# Allegro board 8266-OLED-TIMER-MAX-V2-4L.brd
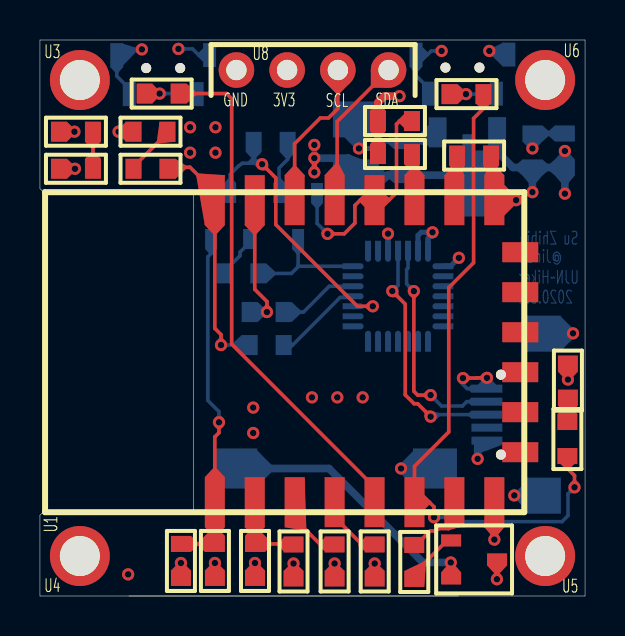
[diagram p0: board, top side]
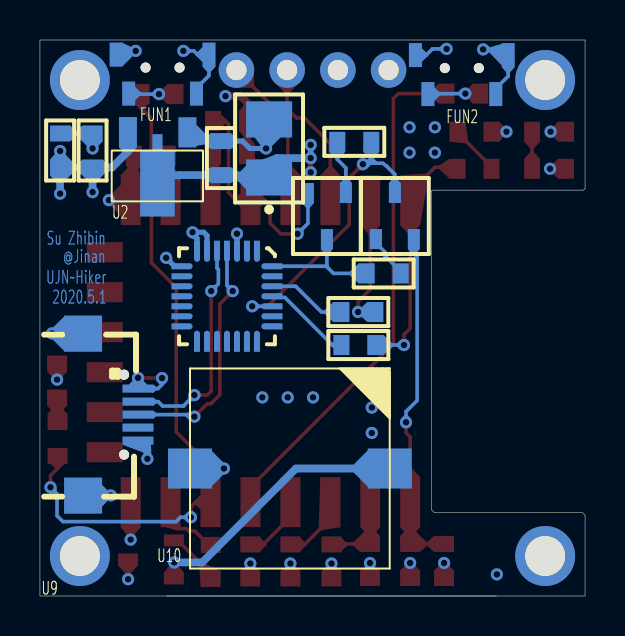
[diagram p1: board, bottom side, seen from below]

Outline 27.3 x 27.8 mm; copper layers: TOP, GND, VCC, BOTTOM. Coordinates in mm from the lower left corner of the outline.
Outline path: 4.45,0 20.95,0 ; 0,27.8 27.3,27.8 27.3,0 0,0 0,4.04 0.13,4.17 7.54,4.17 7.7,4.32 7.7,20.24 7.65,20.29 0.08,20.29 0,20.37 0,27.8

## Design rules (mm)
net group DIFFPAIR1: nets DN DP
net group DIFFPAIR3: nets SCL SDA
net group DIFFPAIR5: nets N136309 N136318

## Placement (name value [footprint] x y rotation side)
C1  0.1u  [SMD0603]  24.66 22.28 90 bottom
C2  0.1u  [SMD0603]  18.24 21.89 90 bottom
C3  100nF  [SMD0603]  7.06 1.75 270 top
C5  10uF  [SMD0603]  26.29 22.28 90 bottom
C6  10uF  [SMDC3528]  15.82 22.38 90 bottom
D1  LED  [SMD0603]  1.8 21.36 0 top
D2  LED  [SMD0603]  5.54 21.36 180 top
D3  LED  [SMD0603]  26.42 7.85 90 top
FUN1  KEY  [2_4_3P5_KEY]  21.16 25.12 180 bottom
FUN2  KEY  [2_4_3P5_KEY]  6.17 25.1 180 bottom
Q1  S8050  [SOT23-3]  9.53 19 90 bottom
Q2  S8050  [SOT23-3]  12.93 19 270 bottom
Q3  S8050  [SOT23-3]  21.74 1.83 0 top
R1  10K  [SMD0603]  17.78 23.75 0 top
R2  10K  [SMD0603]  17.78 22.1 0 top
R3  470  [SMD0603]  16.76 1.73 90 top
R4  10K  [SMD0603]  8.76 1.75 90 top
R5  10K  [SMD0603]  14.76 1.73 90 top
R6  12K  [SMD0603]  10.77 1.75 90 top
R7  12K  [SMD0603]  21.74 22.02 0 top
R8  12K  [SMD0603]  12.7 1.73 270 top
R9  470  [SMD0603]  21.36 25.1 0 top
R10  1K  [SMD0603]  1.8 23.22 180 top
R11  470  [SMD0603]  5.54 23.22 180 top
R12  12K  [SMD0603]  10.08 16.13 0 bottom
R13  470  [SMD0603]  11.35 12.55 180 bottom
R14  470  [SMD0603]  6.1 25.12 0 top
R15  1K  [SMD0603]  18.75 1.7 270 top
R16  12K  [SMD0603]  11.56 22.71 180 bottom
R17  470  [SMD0603]  11.35 14.2 180 bottom
R18  1K  [SMD0603]  26.44 10.77 90 top
U1  ESP8266  [8266]  24.26 4.19 90 top
U2  LM1117F-3.3  [SOT89]  19.91 22.68 270 bottom
U3  1PIN  [HOLE_2MM]  2 25.8 0 top
U4  1PIN  [HOLE_2MM]  2 2 0 top
U5  1PIN  [HOLE_2MM]  25.3 2 0 top
U6  1PIN  [HOLE_2MM]  25.3 25.8 0 top
U7  CP2102  [QFN28]  17.93 14.99 270 bottom
U8  4PIN  [SIP4]  9.84 26.3 0 top
U9  7PIN  [MICROUSB]  24.59 9.07 270 bottom
U10  2PIN  [9650B]  14.78 6.38 0 bottom

## Library data of the parts
C1-C3 C5 = CAP NP
C6 = CAP
D1-D3 = LED
FUN1 FUN2 = KEY_1
Q1-Q3 = NPN BCE
R1-R18 = R
U1 = 8266_0
U2 = lm1117f-3_0.3
U3-U6 = 1PIN
U7 = CP2102_2
U8 = 4PIN
U9 = 7PIN
U10 = 2PIN

## Footprints (pads in the part's own frame, mm; a bottom-side part is the same pattern mirrored in y, then rotated)
2_4_3P5_KEY
  round 0.5 hole 0.749 unplated: (-0.851,1.3) (0.851,1.3)
  rect 0.65x1.199 smd: 1(-1.699,0) 2(1.699,0) 3(-2.324,1.951) 4(2.324,1.951)
8266
  rect 2.499x1.001 smd: 1(0.5,15.499) 2(0.5,13.5) 3(0.5,11.501) 4(0.5,9.5) 5(0.5,7.501) 6(0.5,5.499) 7(0.5,3.5) 8(0.5,1.501) 15(15.601,1.501) 16(15.601,3.5) 17(15.601,5.499) 18(15.601,7.501) 19(15.601,9.5) 20(15.601,11.501) 21(15.601,13.5) 22(15.601,15.499)
  rect 1.001x1.801 smd: 9(3,0.201) 10(5.001,0.201) 11(7,0.201) 12(8.999,0.201) 13(11.001,0.201) 14(13,0.201)
9650B
  rect 2.2x1.999 smd: 1(-5.001,0) 2(5.001,0)
HOLE_2MM
  round 3 hole 1.999 unplated: (0,0)
MICROUSB
  round 0.5 hole 0.5 unplated: (-1.999,1.501) (1.999,1.501)
  rect 0.399x1.549 smd: 1(-1.3,2.2) 2(-0.65,2.2) 3(0,2.2) 4(0.65,2.2) 5(1.3,2.2)
  rect 1.801x1.9 smd: 6(-4.049,-0.551) 7(4.049,-0.551)
QFN28
  custom 1.052x0.3 smd: 1(-2.25,1.501) 2(-2.25,1.001) 3(-2.25,0.5) 4(-2.25,0) 5(-2.25,-0.5) 6(-2.25,-1.001) 7(-2.25,-1.501) 15(2.25,-1.501) 16(2.25,-1.001) 17(2.25,-0.5) 18(2.25,0) 19(2.25,0.5) 20(2.25,1.001) 21(2.25,1.501)
  custom 0.3x1.052 smd: 8(-1.501,-2.25) 9(-1.001,-2.25) 10(-0.5,-2.25) 11(0,-2.25) 12(0.5,-2.25) 13(1.001,-2.25) 14(1.501,-2.25) 22(1.501,2.25) 23(1.001,2.25) 24(0.5,2.25) 25(0,2.25) 26(-0.5,2.25) 27(-1.001,2.25) 28(-1.501,2.25)
SIP4
  round 1.778 hole 1.016: 1(0,0) 2(2.54,0) 3(5.08,0) 4(7.62,0)
SMD0603
  rect 0.8x1.001 smd: 1(-0.851,0) 2(0.851,0)
SMDC3528
  rect 1.801x2.301 smd: 1(-1.45,0) 2(1.45,0)
SOT23-3
  rect 1.001x0.599 smd: 1(-1.151,0.95) 2(-1.151,-0.95) 3(1.151,0)
SOT89
  rect 1.501x0.899 smd: 1(-0.5,0) 3(-0.511,-2.979)
  custom 4.115x1.727 smd: 2(1.651,-1.501)

## Nets
3V3: C2.1 C6.1 R1.1 R2.1 R3.1 R4.1 R5.1 R6.1 R10.2 R11.2 U1.8(VDD) U2.2(OUT) U7.6(VDD) U7.7(REGIN) U8.2
5V: C1.1 C5.1 R18.2 U2.3(IN) U7.8(VBUS) U9.1 U10.2(B-)
0: C1.2 C2.2 C3.2 C5.2 C6.2 D1.1(CATHODE) FUN1.2 FUN1.3 FUN1.4 FUN2.2 FUN2.3 FUN2.4 Q3.3(E) R7.2 R8.2 U1.15(GND) U2.1(GND) U7.3(GND1) U8.1 U9.5 U9.6 U9.7
ADC: R6.2 R8.1 U1.2(ADC)
DN: U7.5(D-) U9.2
DP: U7.4(D+) U9.3
DTR: Q2.3(E) R12.2 U7.28(DTR)
EN: R5.2 U1.3(EN)
GPIO0: Q2.2(C) R1.2 U1.18(GPIO0)
GPIO2: R2.2 U1.17(GPIO2)
GPIO12: D3.1(CATHODE) R9.2 U1.6(GPIO12)
GPIO13: R15.1 U1.7(GPIO13)
GPIO14: R14.2 U1.5(GPIO14)
GPIO15: R7.1 U1.16(GPIO15)
NRST: C3.1 Q1.2(C) R4.2 U1.1(RST)
RTS: Q1.3(E) R16.2 U7.24(RTS)
RXD0: R17.2 U1.21(RXD0)
SCL: U1.20(GPIO5) U8.3
SDA: U1.19(GPIO4) U8.4
TXD0: D2.1(CATHODE) R13.2 U1.22(TXD0)
N95302: R3.2 U1.4(GPIO16)
N129374: D1.2(ANODE) R10.1
N136309: R13.1 U7.25(RXD)
N136318: R17.1 U7.26(TXD)
N137451: Q1.1(B) R12.1
N142546: D2.2(ANODE) R11.1
N142892: FUN1.1 R9.1
N144693: FUN2.1 R14.1
N146946: Q3.2(C) U10.1(B+)
N146953: Q3.1(B) R15.2
N147782: Q2.1(B) R16.1
N148740: D3.2(ANODE) R18.1

Pads without a net: U1 9 10 11 12 13 14; U7 1 2 9 10 11 12 13 14 15 16 17 18 19 20 21 22 23 27; U9 4

## Via types
v1: diameter 0.61, hole 0.33, TOP to BOTTOM, 60 vias

## Routing (per net, layer and track width the routed paths; a pad name or vN(x,y) marks a point on that pad's centre or on a via; arc(x,y) is an arc through that point)
3V3: length 48.2
  TOP w0.178: R4.1 v1(8.76,1.65) ; R3.1 v1(16.76,1.63) ; R6.1 v1(10.77,1.65) ; R5.1 v1(14.76,1.63) ; R11.2 v1(3.94,23.22) ; R10.2 v1(1.73,23.22)
  TOP w0.254: v1(13.74,21.89) v1(13.74,21.18)
  TOP w0.381: R2.1 R1.1 16.93,24.68 17.25,24.99 v1(18.01,24.99) ; U1.8 v1(22.76,2.82)
  VCC w0.178: 13.74,20.7 v1(13.74,21.18) ; v1(13.74,21.18) 13.25,21.18 ; v1(13.74,21.18) 14.23,21.18 ; 16.28,1.63 v1(16.76,1.63) ; v1(16.76,1.63) 16.76,2.11 ; v1(16.76,1.63) 17.25,1.63 ; v1(16.76,1.63) 16.76,1.14 ; U8.2 12.38,27.37 ; U8.2 12.38,25.23 ; U8.2 13.45,26.3 ; U8.2 11.31,26.3 ; 19.66,17.7 v1(19.66,18.19) ; v1(19.66,18.19) 19.17,18.19 ; v1(19.66,18.19) 19.66,18.67 ; v1(19.66,18.19) 20.15,18.19 ; 14.76,1.14 v1(14.76,1.63) ; v1(14.76,1.63) 14.76,2.11 ; v1(14.76,1.63) 14.27,1.63 ; v1(14.76,1.63) 15.25,1.63 ; 22.27,2.82 v1(22.76,2.82) ; v1(22.76,2.82) 22.76,3.31 ; v1(22.76,2.82) 22.76,2.33 ; v1(22.76,2.82) 23.25,2.82 ; 8.28,1.65 v1(8.76,1.65) ; v1(8.76,1.65) 9.25,1.65 ; v1(8.76,1.65) 8.76,2.14 ; v1(8.76,1.65) 8.76,1.16 ; v1(3.94,23.22) 3.94,23.7 ; v1(3.94,23.22) 4.42,23.22 ; v1(3.94,23.22) 3.45,23.22 ; v1(3.94,23.22) 3.94,22.73 ; 10.28,1.65 v1(10.77,1.65) ; v1(10.77,1.65) 10.77,1.16 ; v1(10.77,1.65) 11.26,1.65 ; v1(10.77,1.65) 10.77,2.14 ; v1(1.73,23.22) 1.73,23.7 ; v1(1.73,23.22) 1.24,23.22 ; v1(1.73,23.22) 1.73,22.73 ; v1(1.73,23.22) 2.21,23.22 ; 13.25,21.89 v1(13.74,21.89) 14.23,21.89 ; v1(13.74,22.56) 13.74,23.04 ; v1(13.74,22.56) 13.25,22.56 ; v1(13.74,22.56) 14.23,22.56 ; 17.52,24.99 v1(18.01,24.99) ; v1(18.01,24.99) 18.5,24.99 ; v1(18.01,24.99) 18.01,24.51
  BOTTOM w0.254: C6.1 15.87,20.88 16.05,20.88 ; U7.7 19.43,17.88 19.66,18.11 v1(19.66,18.19) 19.1,18.19 18.93,18.02 U7.6 ; v1(13.74,21.89) v1(13.74,22.56)
  BOTTOM w0.381: v1(13.74,21.89) 15.44,21.89 15.82,21.51 C6.1 17.29,20.93 17.41,21.04 C2.1 20.32,21.04 20.33,21.03 U2.2
5V: length 29
  TOP w0.178: v1(21.18,10.9) 21.85,10.9 21.86,10.91 v1(22.39,10.91) ; R18.2 v1(26.44,10.82)
  VCC w0.178: v1(24.66,20.19) 24.66,20.68 ; v1(24.66,20.19) 24.66,19.71 ; v1(24.66,20.19) 25.15,20.19 ; v1(18.08,6.38) 18.57,6.38 ; v1(18.08,6.38) 18.08,5.89 ; v1(18.08,6.38) 18.08,6.86 ; 21.18,10.41 v1(21.18,10.9) ; v1(21.18,10.9) 20.7,10.9 ; v1(21.18,10.9) 21.18,11.38 ; v1(21.18,10.9) 21.67,10.9 ; v1(26.29,20.12) 26.78,20.12 ; v1(26.29,20.12) 26.29,19.63 ; v1(26.29,20.12) 26.29,20.6 ; v1(26.29,20.12) 25.8,20.12 ; 20.98,16.42 v1(20.98,16.91) ; v1(20.98,16.91) 20.98,17.4 ; v1(20.98,16.91) 20.49,16.91 ; v1(20.98,16.91) 21.47,16.91 ; v1(26.29,22.25) 26.29,22.74 ; v1(26.29,22.25) 25.8,22.25 ; v1(26.29,22.25) 26.29,21.76 ; v1(26.29,22.25) 26.78,22.25 ; 25.95,10.82 v1(26.44,10.82) ; v1(26.44,10.82) 26.44,11.31 ; v1(26.44,10.82) 26.44,10.33 ; v1(26.44,10.82) 26.93,10.82 ; 21.9,10.91 v1(22.39,10.91) ; v1(22.39,10.91) 22.39,10.42 ; v1(22.39,10.91) 22.39,11.39
  BOTTOM w0.178: v1(22.39,10.91) U9.1 21.39,10.37 21.18,10.58 v1(21.18,10.9)
  BOTTOM w0.254: C5.1 v1(26.29,22.25) ; v1(20.98,16.91) 20.56,16.49 U7.8
  BOTTOM w0.381: C1.1 23.69,21.42 22.89,22.22 U2.3 ; C1.1 C5.1 v1(26.29,20.12) ; C1.1 v1(24.66,20.19) ; U10.2 v1(18.08,6.38)
0: length 58.5
  TOP w0.178: C3.2 v1(7.06,1.65) ; Q3.3 v1(22.89,0.84) ; R8.2 v1(12.7,1.63) ; D1.1 v1(1.75,21.36)
  TOP w0.254: R7.2 22.59,19.95 U1.15 v1(23.85,19.79)
  GND w0.178: v1(23.75,5.03) 23.75,5.52 ; v1(23.75,5.03) 23.75,4.54 ; v1(23.75,5.03) 23.27,5.03 ; v1(23.75,5.03) 24.24,5.03 ; 9.84,25.23 U8.1 ; U8.1 8.77,26.3 ; U8.1 10.91,26.3 ; U8.1 9.84,27.37 ; v1(24.66,22.38) 25.15,22.38 ; v1(24.66,22.38) 24.66,21.89 ; v1(24.66,22.38) 24.66,22.87 ; v1(24.66,22.38) 24.18,22.38 ; v1(17.43,18.12) 17.92,18.12 ; v1(17.43,18.12) 17.43,18.61 ; v1(17.43,18.12) 17.43,17.63 ; v1(17.43,18.12) 16.94,18.12 ; v1(26.7,13.13) 26.7,13.62 ; v1(26.7,13.13) 26.21,13.13 ; v1(26.7,13.13) 26.7,12.64 ; 22.02,27.25 v1(22.5,27.25) 22.99,27.25 ; 23.85,19.3 v1(23.85,19.79) ; v1(23.85,19.79) 23.85,20.28 ; v1(23.85,19.79) 23.36,19.79 ; 21.92,6.37 v1(21.92,6.86) ; v1(21.92,6.86) 22.41,6.86 ; v1(21.92,6.86) 21.43,6.86 ; v1(21.92,6.86) 21.92,7.35 ; v1(15.98,22.38) 16.46,22.38 ; v1(15.98,22.38) 15.49,22.38 ; v1(15.98,22.38) 15.98,21.89 ; v1(15.98,22.38) 15.98,22.87 ; v1(22.89,0.84) 22.89,1.33 ; v1(22.89,0.84) 22.89,0.35 ; v1(22.89,0.84) 23.37,0.84 ; v1(22.89,0.84) 22.4,0.84 ; v1(12.7,1.63) 12.7,2.11 ; v1(12.7,1.63) 13.19,1.63 ; v1(12.7,1.63) 12.7,1.14 ; v1(12.7,1.63) 12.21,1.63 ; 5.59,27.33 v1(5.11,27.33) 4.62,27.33 ; 7.06,1.16 v1(7.06,1.65) ; v1(7.06,1.65) 6.57,1.65 ; v1(7.06,1.65) 7.55,1.65 ; v1(7.06,1.65) 7.06,2.14 ; v1(1.75,21.36) 1.75,21.85 ; v1(1.75,21.36) 2.24,21.36 ; v1(1.75,21.36) 1.26,21.36 ; v1(1.75,21.36) 1.75,20.87 ; 20.6,27.25 v1(20.12,27.25) 19.63,27.25 ; 7.42,27.36 v1(6.93,27.36) 6.45,27.36
  BOTTOM w0.178: FUN2.2 4.47,25.37 3.85,25.99 FUN2.4 4.09,27.3 v1(5.11,27.33) ; v1(20.12,27.25) 19.59,27.25 19.41,27.07 FUN1.4 18.83,26.02 19.46,25.39 FUN1.2 ; v1(22.5,27.25) 23.3,27.25 FUN1.3 ; FUN2.3 7.95,27.05 7.64,27.36 v1(6.93,27.36)
  BOTTOM w0.254: v1(24.66,22.38) C1.2 C5.2 ; C6.2 15.98,23.68 v1(15.98,22.38) 16.79,22.38 17.16,22.75 C2.2 19.78,22.75 U2.1 ; U7.3 v1(17.43,18.12)
  BOTTOM w0.381: v1(23.75,5.03) 23.9,5.03 23.91,5.02 U9.7 ; U9.5 21.92,7.3 v1(21.92,6.86) ; U9.6 26.68,13.12 v1(26.7,13.13)
  vias: v1(4.42,1.08) v1(7.52,23.44) v1(7.52,22.17) v1(8.79,23.44) v1(8.79,22.17) v1(10.68,9.42) v1(10.68,8.15) v1(13.62,9.93) v1(14.89,9.93) v1(16.16,9.93)
ADC: length 4
  TOP w0.178: U1.2 10.76,2.62 R6.2 11.96,2.6 11.98,2.58 R8.1
DN: length 11.2
  TOP w0.178: v1(19.57,10.05) 18.92,10.05 18.72,10.24 v1(18.72,15.25)
  BOTTOM w0.178: v1(19.57,10.05) 20.11,9.5 21.16,9.5 21.38,9.72 U9.2 ; v1(18.72,15.25) 18.36,15.61 18.36,16.33 18.43,16.4 U7.5
DP: length 12.2
  TOP w0.178: v1(19.57,8.97) 18.92,9.61 18.74,9.61 18.29,10.06 18.29,14.6 v1(17.65,15.25)
  BOTTOM w0.178: v1(19.57,8.97) 19.67,9.07 U9.3 ; U7.4 17.93,15.53 v1(17.65,15.25)
DTR: length 6.3
  BOTTOM w0.178: 12.95,16.49 12.6,16.13 R12.2 ; 12.95,16.49 12.93,16.51 Q2.3 ; 12.95,16.49 U7.28
EN: length 3.4
  TOP w0.178: U1.3 12.76,3.86 14.04,2.58 R5.2
GPIO0: length 11.3
  TOP w0.178: v1(14.4,18.11) 15.24,18.11 15.77,18.64 15.77,19.53 16.04,19.79 U1.18 17.48,19.79 17.86,20.17 17.86,23.59 18.01,23.75 R1.2
  BOTTOM w0.178: Q2.2 13.88,18.63 v1(14.4,18.11)
GPIO2: length 2.4
  TOP w0.178: R2.2 18.76,21.97 U1.17
GPIO12: length 33.6
  TOP w0.178: D3.1 26.42,6.38 26.77,6.02 v1(26.77,5.44) ; v1(19.74,3.94) 19.74,4.46 19.5,4.69 U1.6 18.76,6.49 20.47,8.2 20.47,15.42 21.72,16.66 21.72,23.88 22.21,24.38 R9.2
  BOTTOM w0.178: v1(26.77,5.44) 26.44,5.11 26.44,4.02 26.15,3.72 20.48,3.72 20.26,3.94 v1(19.74,3.94)
GPIO13: length 3.5
  TOP w0.178: R15.1 18.84,2.55 19.54,3.25 19.85,3.25 19.97,3.37 20.45,3.37 20.68,3.59 20.68,4.61 U1.7
GPIO14: length 25.9
  TOP w0.178: U1.5 16.76,5.44 9.6,12.6 9.6,24.87 9.35,25.12 R14.2
GPIO15: length 2.3
  TOP w0.178: R7.1 20.89,19.93 U1.16
NRST: length 17.3
  TOP w0.178: C3.1 R4.2 8.76,2.61 U1.1 8.76,7.96 8.97,8.16 v1(8.97,8.69)
  BOTTOM w0.178: v1(8.97,8.69) 8.97,9.22 8.41,9.78 8.41,16.96 8.58,17.13 Q1.2
RTS: length 14.7
  TOP w0.178: v1(11.13,21.59) 11.81,20.9 11.81,18.57 15.9,14.49 v1(16.67,14.49)
  BOTTOM w0.178: v1(11.13,21.59) 11.08,21.64 10.71,21.64 ; U7.24 v1(16.67,14.49) ; Q1.3 9.53,21.08 9.93,21.49 10.14,21.64 10.71,21.64 ; R16.2 10.71,21.64
RXD0: length 6.7
  TOP w0.178: v1(11.37,14.2) 11.37,14.72 10.76,15.33 U1.21
  BOTTOM w0.178: R17.2 v1(11.37,14.2)
SCL: length 7.6
  TOP w0.178: U8.3 14.92,24.37 14.45,23.9 14.04,23.9 12.76,22.61 U1.20
SDA: length 7.6
  TOP w0.178: U8.4 14.88,23.72 14.88,19.92 U1.19
TXD0: length 12.1
  TOP w0.178: D2.1 6.46,21.44 7.52,21.44 8.76,20.2 U1.22 8.76,13.38 9.07,13.07 v1(9.07,12.55)
  BOTTOM w0.178: v1(9.07,12.55) R13.2
N95302: length 3.4
  TOP w0.178: R3.2 16.05,2.58 16.05,2.65 14.76,3.94 U1.4
N129374: length 1.9
  TOP w0.178: D1.2 R10.1
N136309: length 4.5
  BOTTOM w0.178: R13.1 12.65,12.55 15.03,14.93 15.62,14.93 U7.25
N136318: length 4
  BOTTOM w0.178: R17.1 13.2,14.2 14.49,15.49 U7.26
N137451: length 2.2
  BOTTOM w0.178: Q1.1 10.47,17.65 10.02,17.19 10.02,17.02 9.23,16.23 R12.1
N142546: length 2.6
  TOP w0.178: R11.1 6.39,23.12 6.34,23.12 4.69,21.46 D2.2
N142892: length 2.4
  TOP w0.178: R9.1 v1(21.34,25.1)
  BOTTOM w0.178: v1(21.34,25.1) 22.29,25.1 22.31,25.12 FUN1.1
N144693: length 2.6
  TOP w0.178: R14.1 v1(5.99,25.12)
  BOTTOM w0.178: FUN2.1 7.33,25.1 7.3,25.12 v1(5.99,25.12)
N146946: length 13.5
  TOP w0.381: Q3.2 20.59,1.66 v1(20.57,1.68)
  BOTTOM w0.381: v1(20.57,1.68) 19.18,1.68 14.48,6.38 U10.1
N146953: length 2.9
  TOP w0.178: Q3.1 20.39,2.78 18.84,1.23 18.84,0.85 R15.2
N147782: length 2.7
  BOTTOM w0.178: R16.1 12.41,21.83 11.98,21.4 Q2.1
N148740: length 1.2
  TOP w0.178: D3.2 26.44,8.72 R18.1

## Copper pours and planes (outline as drawn; the poured copper is in the pictures)
3V3 on TOP (solid shape): 23.26,3.44 22.86,2.97 22.76,2.94 22.66,2.97 22.26,3.44 22.76,4.74
3V3 on BOTTOM (solid shape): 17.46,21.02 17.49,20.93 17.46,20.84 16.97,20.34 15.78,20.93 16.97,21.52
3V3 on BOTTOM (solid shape): 15.26,21.92 15.34,22.05 15.48,22.08 16.63,21.63 15.84,20.88 15.25,20.61
3V3 on VCC: 0.06,0.06 0.06,4.03 8.08,4.03 8.24,4.19 8.24,20.15 8.03,20.36 0.06,20.36 0.06,27.74 27.24,27.74 27.24,24.36 22.47,24.36 22.17,24.06 22.17,22.5 22.38,22.3 22.38,18.75 22.14,18.52 21.31,18.52 19.35,16.57 19.35,16.23 19.5,16.08 21.08,16.08 21.21,15.95 21.21,12.53 17.53,8.84 17.53,5.61 18.13,5 20.71,5 21.62,5.92 27.24,5.92 27.24,0.06
5V on BOTTOM (solid shape): 19.83,6.38 18.69,5.51 17.93,6.27 17.89,6.38 17.93,6.48 18.69,7.24
5V on VCC: 18.19,5.16 17.68,5.67 17.68,8.78 21.36,12.47 21.36,16.01 21.14,16.23 19.56,16.23 19.51,16.29 19.51,16.5 21.37,18.36 22.2,18.36 22.53,18.69 22.53,22.36 22.33,22.56 22.33,24 22.53,24.21 27.24,24.21 27.24,6.07 21.56,6.07 20.65,5.16
0 on TOP (solid shape): 22.49,21.64 22.57,21.7 22.67,21.67 23.26,21.04 22.76,19.76 22.26,21.04
0 on BOTTOM (solid shape): 25.19,5.02 24.19,4.47 23.74,4.93 23.72,5.02 23.74,5.11 24.19,5.57
0 on BOTTOM (solid shape): 16.56,22.96 16.07,22.29 15.98,22.25 15.9,22.28 15.25,22.93 15.82,23.86
0 on BOTTOM (solid shape): 26.84,13.23 26.87,13.12 26.84,13.01 26.08,12.26 25.09,13.12 26.08,13.98
0 on GND: 0.06,0.06 0.06,4.03 8.08,4.03 8.24,4.19 8.24,20.15 8.03,20.36 0.06,20.36 0.06,27.74 27.24,27.74 27.24,0.06
ADC on TOP (solid shape): 11.26,3.44 10.81,2.96 10.76,2.94 10.7,2.96 10.26,3.44 10.76,4.71
EN on TOP (solid shape): 13.34,3.36 13.31,3.3 13.25,3.27 12.26,3.44 12.75,4.71 13.25,5.94
GPIO2 on TOP (solid shape): 18.7,21.52 18.76,21.54 18.81,21.52 19.26,21.04 18.76,19.77 18.26,21.04
GPIO13 on TOP (solid shape): 20.76,4.71 21.23,3.51 20.47,3.28 20.4,3.3 20.37,3.37 20.37,5.42
GPIO15 on TOP (solid shape): 20.83,21.65 20.9,21.67 20.97,21.64 21.26,21.04 20.75,19.77 20.26,21.04
NRST on TOP (solid shape): 8.7,6.42 8.76,6.44 8.81,6.42 9.26,5.94 8.76,4.67 8.26,5.94
NRST on TOP (solid shape): 9.26,3.44 8.81,2.96 8.76,2.94 8.7,2.96 8.26,3.44 8.76,4.71
RXD0 on TOP (solid shape): 11.26,18.54 10.81,18.06 10.76,18.04 10.7,18.06 10.26,18.54 10.76,19.81
SCL on TOP (solid shape): 12.7,21.52 12.76,21.54 12.81,21.52 13.26,21.04 12.76,19.77 12.26,21.04
SDA on TOP (solid shape): 14.83,21.65 14.9,21.67 14.96,21.63 15.26,21.04 14.75,19.77 14.26,21.04
TXD0 on TOP (solid shape): 9.26,18.54 8.81,18.06 8.76,18.04 8.7,18.06 8.26,18.54 8.76,19.81
TXD0 on TOP (solid shape): 9.26,21.04 8.77,19.77 8.26,18.54 7.83,21.03 7.85,21.1 7.91,21.13
N146946 on BOTTOM (solid shape): 11.67,6.48 11.71,6.38 11.67,6.27 10.88,5.47 9.73,6.38 10.88,7.28
5V on BOTTOM (solid shape): 23.34,22.44 22.98,22.05 22.89,22.03 22.81,22.05 22.44,22.44 22.89,23.24
0 on TOP (solid shape): 23.95,19.87 23.97,19.79 23.95,19.72 23.26,19.02 22.72,19.79 23.26,20.56
0 on BOTTOM (solid shape): 4.84,27.4 4.89,27.34 4.88,27.27 4.17,26.53 3.83,27.04 4.11,27.63
0 on BOTTOM (solid shape): 23.51,27.07 23.16,26.49 22.45,27.2 22.43,27.27 22.48,27.33 23.2,27.67
0 on BOTTOM (solid shape): 22.42,7.8 23.16,7.57 21.96,7.11 21.82,7.13 21.74,7.24 21.73,7.92
0 on BOTTOM (solid shape): 19.94,23.2 19.57,22.49 18.79,22.63 18.71,22.71 18.73,22.82 19.47,23.56
SCL on TOP (solid shape): 15.54,25.67 14.98,25.11 14.92,25.08 14.86,25.11 14.3,25.67 14.92,26.32
N142546 on TOP (solid shape): 6.4,23.23 6.79,22.72 5.94,22.63 5.88,22.66 5.85,22.72 5.99,23.72
N146953 on TOP (solid shape): 19.21,1.71 19.29,1.7 19.33,1.63 19.24,0.45 18.73,0.83 18.24,1.25

Small or netless copper shapes (teardrops, artwork), in the pictures only: 72 on TOP, 68 on BOTTOM

## Text on the board
BOTTOM: @Jinan | 2020.5.1 | Su Zhibin | UJN~Hiker
Ref Des/Silkscreen Top: GND | 3V3 | SCL | SDA
